# Altium PCB receiver.PcbDoc
Units mil, origin at the board's own origin, x right, y up, seen from the top; angles counter-clockwise.
Board outline 1968.5 x 3897.64 mil, 2 copper layers (Top Layer, Bottom Layer); 43 components, 17 nets, 113 pads, 22 vias.
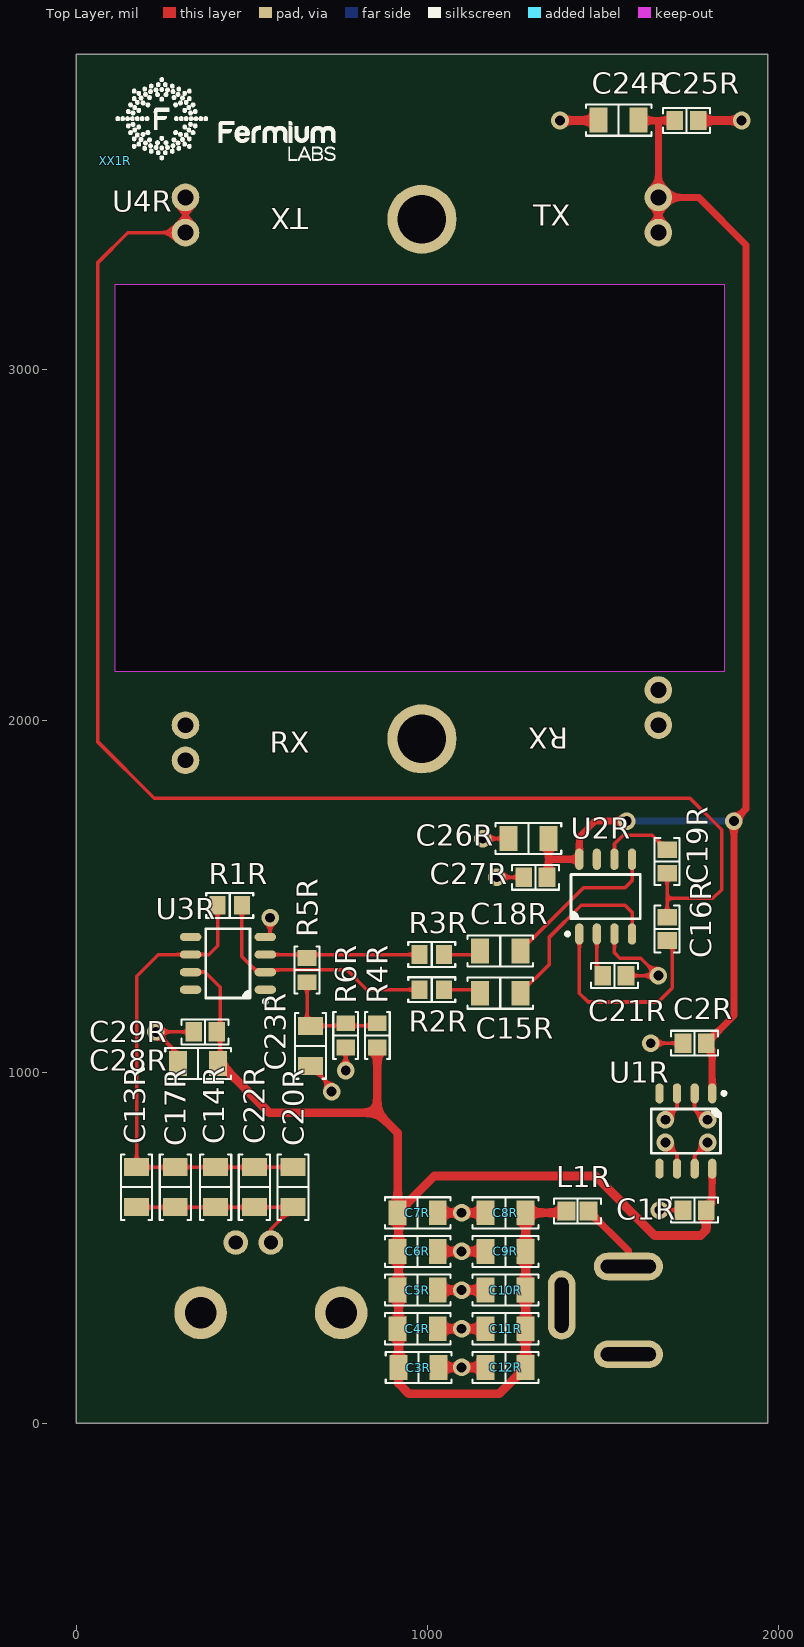
[diagram p0: Top Layer view]
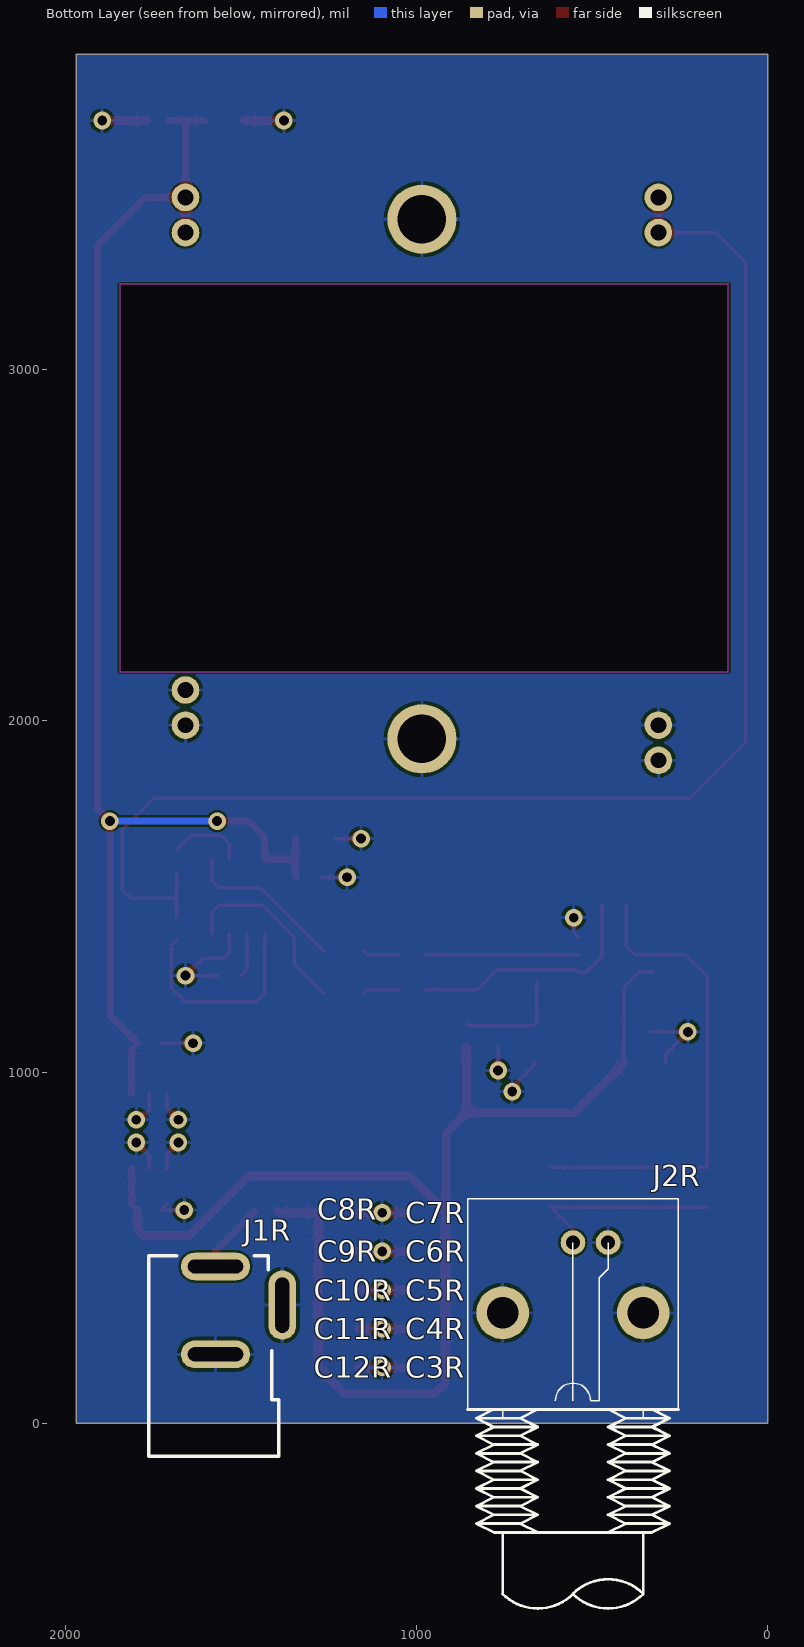
[diagram p1: Bottom Layer view, seen from below]

## Layer stack, top to bottom
Top Solder: solder mask 0.4, Solder Resist, Dk 3.5
Top Layer: signal copper 1.4
Dielectric 1: dielectric 12.6, FR-4, Dk 4.8
Bottom Layer: signal copper 1.4
Bottom Solder: solder mask 0.4, Solder Resist, Dk 3.5

## Board outline
0,0 1968.5,0 1968.5,3897.64 0,3897.64

## Design rules (kind name [scope] priority, off if disabled: settings)
Clearance [All] p1: gap=6 ignorepadtopadclearanceinfootprint=FALSE
FanoutControl Fanout_LCC [All] p1 off: bgadir=Out bgaviamode=Centered fanoutstyle=Auto fanoutdirection=Alternating viagrid=1 // Protel DXP Scope 1 Expression Was: IsLCC   Fanout_LCC (Default Rule)
FanoutControl Fanout_BGA [All] p2 off: bgadir=Out bgaviamode=Centered fanoutstyle=Auto fanoutdirection=Alternating viagrid=1 // Protel DXP Scope 1 Expression Was: IsBGA   Fanout_BGA (Default Rule)
FanoutControl Fanout_SOIC [All] p3 off: bgadir=Out bgaviamode=Centered fanoutstyle=Auto fanoutdirection=Alternating viagrid=1 // Protel DXP Scope 1 Expression Was: IsSOIC   Fanout_SOIC (Default Rule)
FanoutControl Fanout_Default [All] p4: bgadir=Out bgaviamode=Centered fanoutstyle=Auto fanoutdirection=Alternating viagrid=1 // Fanout_Default (Default Rule)
FanoutControl Fanout_Small [All] p5 off: bgadir=Out bgaviamode=Centered fanoutstyle=Auto fanoutdirection=Alternating viagrid=1 // Protel DXP Scope 1 Expression Was: (CompPinCount < 5)   Fanout_Small (Default Rule)
HoleSize [All] p1: absolutevalues=TRUE maxlimit=99999 minlimit=11.81 maxpercent=80.000 minpercent=20.000
MinimumSolderMaskSliver [All] p1 off: minsoldermaskwidth=7.87
PolygonConnect [All] p1: connectstyle=Relief reliefconductorwidth=10 reliefentries=4 polygonreliefangle="90 Angle" airgapwidth=10
RoutingVias [All] p1: holewidth=28 width=50 viastyle="Through Hole" minholewidth=28 minwidth=50 maxholewidth=28 maxwidth=50
SilkToSilkClearance [All] p1: silktosilkclearance=7.87
SilkToSolderMaskClearance [All] p1 off: minsilkscreentomaskgap=10 clearancetoexposedcopper=TRUE // Protel DXP Scope 1 Expression Was: IsPad
SolderMaskExpansion [All] p1: expansion=2
Width [All] p1: maxlimit=200 minlimit=6 preferedwidth=10
21 further rules are at their usual default settings.

## Components (designator, comment, footprint, x,y, rotation, side; value= is the part's Value field where it differs from the comment)
C1R "100nF 0805" "CAP 0805_2012" 1760.51,607.32 r180 top
C2R "100nF 0805" "CAP 0805_2012" 1760.51,1082.32 r180 top
C3R "10uF 25V 1206" "CAP 1206_3216" 974.88,159.09 r0 top
C4R "10uF 25V 1206" "CAP 1206_3216" 972.24,269.65 r0 top
C5R "10uF 25V 1206" "CAP 1206_3216" 972.24,379.65 r0 top
C6R "10uF 25V 1206" "CAP 1206_3216" 972.24,489.65 r0 top
C7R "10uF 25V 1206" "CAP 1206_3216" 972.24,599.65 r0 top
C8R "10uF 25V 1206" "CAP 1206_3216" 1222.24,599.65 r180 top
C9R "10uF 25V 1206" "CAP 1206_3216" 1222.24,489.65 r180 top
C10R "10uF 25V 1206" "CAP 1206_3216" 1222.24,379.65 r180 top
C11R "10uF 25V 1206" "CAP 1206_3216" 1222.24,269.65 r180 top
C12R "10uF 25V 1206" "CAP 1206_3216" 1222.24,159.65 r180 top
C13R "10uF 25V 1206" "CAP 1206_3216" 172.24,672.56 r270 top
C14R "10uF 25V 1206" "CAP 1206_3216" 397.24,672.56 r270 top
C15R "10uF 25V 1206" "CAP 1206_3216" 1207.24,1224.65 r180 top
C16R "1nF 0805" "CAP 0805_2012" 1682.24,1407.65 r270 top
C17R "10uF 25V 1206" "CAP 1206_3216" 282.24,672.56 r270 top
C18R "10uF 25V 1206" "CAP 1206_3216" 1207.24,1344.65 r180 top
C19R "1nF 0805" "CAP 0805_2012" 1682.24,1599.65 r90 top
C20R "10uF 25V 1206" "CAP 1206_3216" 617.24,672.56 r270 top
C21R "100nF 0805" "CAP 0805_2012" 1532.24,1274.65 r0 top
C22R "10uF 25V 1206" "CAP 1206_3216" 507.24,672.56 r270 top
C23R "10uF 25V 1206" "CAP 1206_3216" 667.24,1074.65 r270 top
C24R "10uF 25V 1206" "CAP 1206_3216" 1544.24,3709.65 r180 top
C25R "100nF 0805" "CAP 0805_2012" 1737.24,3708.65 r0 top
C26R "10uF 25V 1206" "CAP 1206_3216" 1287.24,1664.65 r180 top
C27R "100nF 0805" "CAP 0805_2012" 1307.24,1554.65 r180 top
C28R "10uF 25V 1206" "CAP 1206_3216" 347.24,1024.65 r180 top
C29R "100nF 0805" "CAP 0805_2012" 367.24,1114.65 r180 top
J1R "DC-10A FC68148" dc-jack 1571.8,446.85 r270 bottom
J2R "1-1337543-0" BNC-RA 754.33,314.96 r0 bottom
L1R "BLM21AG102SN1D" "FER 0805_2012" 1427.24,604.65 r180 top
R1R "220K 0805" "RES 0805_2012" 437.24,1474.65 r180 top
R2R "10K 0805" "RES 0805_2012" 1012.24,1234.65 r180 top
R3R "10K 0805" "RES 0805_2012" 1012.24,1334.65 r180 top
R4R "1K 0805" "RES 0805_2012" 857.24,1104.65 r270 top
R5R "220K 0805" "RES 0805_2012" 657.24,1290.2 r90 top
R6R "1K 0805" "RES 0805_2012" 767.24,1104.65 r90 top
U1R "L78L05ACD" "ST SOIC-8N" 1735.51,832.32 r270 top
U2R "SA612A" "TI SOIC-8 D" 1507.24,1499.65 r90 top
U3R "LF356M/NOPB" "TI SOIC-8 D" 432.24,1309.65 r180 top
U4R "HB100" HB100-buried 311.24,3489.65 r270 top
XX1R "FermiumLABS Logo" frm-med 111.81,3594.65 r0 top

## Footprints (in the part's own frame and the unit in brackets; to place one, negate y for a bottom-side part, rotate by r counter-clockwise, add the part's x,y. Pads: shape width x height; smd on the part's side, far side on the other; paste and mask are expansions set on the pad)
BNC-RA [mil]
  round 70 hole 40: 1(-200,-200) 2(-300,-200)
  round 150 hole 90: A(0,0) B(-400,0)
  silkscreen extent -500,-325 100,842, body extent -490,-280 91,1127, height 619
"CAP 0805_2012" [mm]
  rect 1.2x1.4 smd: 1(-0.838,0) 2(0.838,0)
  silkscreen extent -1.7,-0.9 1.7,0.9, body extent -1,-0.64 1,0.64, height 1.26
"CAP 1206_3216" [mm]
  rect 1.3x1.8 smd: 1(-1.45,0) 2(1.45,0)
  silkscreen extent -2.37,-1.12 2.37,1.12, body extent -1.6,-0.81 1.6,0.81, height 1.62
dc-jack [mm]
  oval 2x5 hole 1 slot 4 at 90 deg: 1(0,0) 3(6.35,0)
  oval 5x2 hole 1 slot 4 at 0 deg: 2(2.794,4.826)
  silkscreen extent -0.76,-4.83 13.72,4.57, body extent -0.76,-4.62 13.54,5.13, height 11.3
"FER 0805_2012" [mm]
  rect 1.3x1.4 smd: 1(-0.8,0) 2(0.8,0)
  silkscreen extent -1.7,-0.9 1.7,0.9, body extent -1,-0.64 1,0.64, height 1.26
frm-med [mil]
  silkscreen extent 1,1 626,237
HB100-buried [mm]
  round 2 hole 1.143: 1(0,34.188) 1(2.54,34.188) 2(0,0) 2(2.54,0) 3(38.151,0) 3(40.691,0) 4(35.611,34.188) 4(38.151,34.188)
  round 5 hole 3.5: 5(1.575,17.094) 5(39.141,17.094)
  Keep-Out Layer board cut-out: 34.286,38.934 34.286,-5.066 6.286,-5.066 6.286,38.934
  body extent -3.02,-3 43.48,37, height 3
"RES 0805_2012" [mm]
  rect 1.15x1.35 smd: 1(-0.875,0) 2(0.875,0)
  silkscreen extent -1.7,-0.9 1.7,0.9, body extent -0.95,-0.62 1.05,0.63, height 0.6
"ST SOIC-8N" [mm] "SOIC, 8-Leads, Body 4.90x3.90mm, Pitch 1.27mm, IPC Medium Density"
  oval 1.45x0.6 smd: 1(-2.725,1.905) 2(-2.725,0.635) 3(-2.725,-0.635) 4(-2.725,-1.905) 5(2.725,-1.905) 6(2.725,-0.635) 7(2.725,0.635) 8(2.725,1.905)
  silkscreen extent -2.85,-2.5 1.6,2.88, body extent -3.01,-2.45 3.01,2.45, height 1.5
"TI SOIC-8 D" [mm] "SOP, 8-Leads, Body 4.90x3.90mm, Pitch 1.27mm, IPC Medium Density"
  oval 1.55x0.6 smd: 1(-2.7,1.905) 2(-2.7,0.635) 3(-2.7,-0.635) 4(-2.7,-1.905) 5(2.7,-1.905) 6(2.7,-0.635) 7(2.7,0.635) 8(2.7,1.905)
  silkscreen extent -2.82,-2.5 1.6,2.88, body extent -3.01,-2.45 3.01,2.45, height 1.5

## Part data
C1R C2R C21R C25R C27R C29R: library part C100nF, "Capacitor", Manufacturer=YAGEO, Manufacturer Part Number=CC0805JRX7R9BB104, Part Number=C100nF
C3R C4R C5R C6R C7R C8R C9R C10R C11R C12R C13R C14R C15R C17R C18R C20R C22R C23R C24R C26R C28R: library part C10uF, "Capacitor", Manufacturer=SAMSUNG, Manufacturer Part Number=CL31A106KAHNNNE, Part Number=C10uF
C16R C19R: library part C1nF, "Capacitor", Manufacturer=Samsung, Manufacturer Part Number=CL21B102KCANNNC, Part Number=C1nF
J1R: library part jackdc, Manufacturer=CLIFF, Manufacturer Part Number="DC-10A FC68148", Part Number=jackdc
J2R: library part BNC-PCB-RA, "connector bnc", Manufacturer="TE CONNECTIVITY", Manufacturer Part Number=1-1337543-0, Part Number=BNC-PCB-RA
L1R: library part "Inductor Iron", "Magnetic-Core Inductor", Manufacturer=Murata, Manufacturer Part Number=BLM21AG102SN1D, Part Number="Inductor Iron"
R1R R5R: library part R220K, "Resistor", Manufacturer=Vishay, Manufacturer Part Number=CRCW0805220KFKEA, Part Number=R220K
R2R R3R: library part R10K, "Resistor", Manufacturer="Royal Electronic Factory", Manufacturer Part Number=0805S8J0103T5E, Part Number=R10K
R4R R6R: library part R1K, "Resistor", Manufacturer="Royal Electronic Factory", Manufacturer Part Number=0805S8J0102T5E, Part Number=R1K
U2R: Supplier Part Number 1=SA612AD, Supplier 1=TME, Supplier 2=Mouser, Supplier Part Number 2=771-SA612AD01112
U3R: library part LF358, Manufacturer="Texas Instruments", Manufacturer Part Number=LF356M/NOPB, Part Number=LF358
U4R: Manufacturer="China unspecified", Manufacturer Part Number=HB100, Part Number=HB100
XX1R: library part fermiumlabs-logo, Part Number=fermiumlabs-logo
U1R: Part Number=L78L05ACD

## Via types
v1: diameter 50, hole 28, Top Layer to Bottom Layer, 22 vias

## Nets (pads, with @x,y where several pads share a name; then routed paths per layer and width w, separated by ;. In a path a pad name is that pad's centre, name@x,y a point inside that pad or via, vN(x,y) a via of type N, cw(c..) or ccw(c..) an arc to the next point about the centre after c; other vN are vias at no path point)
5V: C2R.1 C24R.1 C25R.1 C26R.1 C27R.1 U1R.1 U2R.8 U4R.1 | length 3913.9
  Top Layer w10: C2R.1 C2R.1@1810.51,1065.32
  Top Layer w20: C27R.1 1344.33,1558.73 1344.33,1604.65 ; C26R.1 1344.33,1604.65 ; v1(1567.24,1714.65) 1477.24,1714.65 1432.24,1669.65 U2R.8 1345.63,1605.94 1344.33,1604.65 ; C24R.1@1601.25,3705.57 1604.33,3708.65 C25R.1 ; U4R.1@1657.24,3389.65 U4R.1@1657.24,3489.65 ; 1657.24,3701.65 U4R.1@1657.24,3489.65 ; C2R.1 1872.24,1161.06 v1(1872.24,1714.65) 1907.24,1749.65 1907.24,3354.65 1772.24,3489.65 U4R.1@1657.24,3489.65 ; U1R.1 C2R.1@1810.51,1065.32
  Bottom Layer w20: v1(1567.24,1714.65) v1(1872.24,1714.65)
12V: C1R.1 C3R.1 C4R.1 C5R.1 C6R.1 C7R.1 C8R.1 C9R.1 C10R.1 C11R.1 C12R.1 C28R.1 C29R.1 L1R.2 R4R.2 U1R.8 U3R.7 | length 3948.8
  Top Layer w10: U3R.7 367.24,1284.65 410.16,1241.73 C28R.1@410.16,1024.65 ; C1R.1 C1R.1@1810.51,624.32
  Top Layer w20: C1R.1@1810.51,624.32 U1R.8
  Top Layer w25: C28R.1@410.16,1024.65 550.16,884.65 857.24,884.65 ; R4R.2 857.24,884.65 ; L1R.2 1390.75,599.65 C8R.1 C9R.1 C10R.1 C11R.1 C12R.1 1204.33,84.65 947.24,84.65 917.8,114.09 C3R.1 917.8,379.65 917.8,597.01 C7R.1 ; C1R.1 1793.51,550.91 1777.24,534.65 1647.24,534.65 1477.24,704.65 1020.16,704.65 C7R.1 ; 857.24,884.65 915.16,826.73 C7R.1
GND: C1R.2 C2R.2 C3R.2 C4R.2 C5R.2 C6R.2 C7R.2 C8R.2 C9R.2 C10R.2 C11R.2 C12R.2 C21R.2 C23R.2 C24R.2 C25R.2 C26R.2 C27R.2 C28R.2 C29R.2 J1R.2 J1R.3 J2R.2 J2R.A J2R.B R6R.1 U1R.2 U1R.3 U1R.6 U1R.7 U2R.3 U3R.4 U4R.3 U4R.4 U4R.5 | length 2346.4
  Top Layer w10: C28R.2 290.16,1051.73 v1(227.24,1114.65) C29R.2 ; U3R.4 552.24,1398.35 v1(552.24,1439.65) ; C23R.2@660.16,1024.65 C23R.2 727.24,957.56 v1(727.24,944.65) ; v1(767.24,1004.65) R6R.1 ; v1(1157.24,1664.65) C26R.2 ; v1(1197.24,1554.65) C27R.2 ; U2R.3 1532.24,1339.65 1547.24,1324.65 1607.24,1324.65 v1(1657.24,1274.65) ; C21R.2 v1@1632.24,1274.65 ; v1(1635.51,1082.32) C2R.2 ; v1(1660.51,607.32) C1R.2 C1R.2@1710.51,624.32 ; v1(1677.24,799.65) 1710.51,766.38 U1R.6 ; v1(1677.24,864.65) 1710.51,897.91 U1R.3 ; U1R.7 1760.51,762.91 v1(1797.24,799.65) ; U1R.2 1760.51,891.38 1787.24,864.65 v1(1797.24,864.65)
  Top Layer w25: J2R.A J2R.A@754.65,314.65 ; C3R.2@1029.33,161.73 C3R.2 1032.52,159.65 v1(1097.24,159.65) C12R.2 ; C4R.2 v1(1097.24,269.65) C11R.2 ; C5R.2 v1(1097.24,379.65) C10R.2 ; C6R.2 v1(1097.24,489.65) C9R.2 ; C7R.2 v1(1097.24,599.65) C8R.2 ; v1(1377.24,3708.65) C24R.2@1490.16,3708.65 ; C25R.2@1767.24,3708.65 C25R.2 v1(1894.24,3708.65)
NetC13R_1: C13R.1 C14R.1 C17R.1 C20R.1 C22R.1 R1R.2 U3R.6 | length 1369.3
  Top Layer w10: R1R.2 402.8,1360.2 377.24,1334.65 U3R.6 234.24,1334.65 172.24,1272.65 C13R.1 C17R.1 C14R.1 C22R.1 C20R.1
NetC13R_2: C13R.2 C14R.2 C17R.2 C20R.2 C22R.2 J2R.1 | length 571.6
  Top Layer w10: C13R.2 C17R.2 C14R.2 C22R.2 C20R.2 554.33,552.56 J2R.1
NetC15R_1: C15R.1 U2R.4 | length 536.2
  Top Layer w10: C15R.1 1347.24,1307.56 1347.24,1384.65 1437.24,1474.65 1562.24,1474.65 1582.24,1454.65 U2R.4
NetC15R_2: C15R.2 R2R.1 | length 107.6
  Top Layer w10: R2R.1 1140.16,1234.65 C15R.2
NetC16R_1: C16R.1 C19R.1 U4R.2 | length 4089.1
  Top Layer w10: U4R.2@311.24,3489.65 311.24,3389.65 147.24,3389.65 62.24,3304.65 62.24,1939.65 222.24,1779.65 1747.24,1779.65 1837.24,1689.65 1837.24,1519.65 1812.24,1494.65 1682.24,1494.65 ; C16R.1 1682.24,1494.65 ; C19R.1 1682.24,1494.65
NetC16R_2: C16R.2 U2R.1 | length 601.8
  Top Layer w10: U2R.1 1432.24,1224.65 1457.24,1199.65 1657.24,1199.65 1697.24,1239.65 1697.24,1359.65 C16R.2
NetC18R_1: C18R.1 U2R.5 | length 462.1
  Top Layer w10: C18R.1 1444.33,1524.65 1562.24,1524.65 1582.24,1544.65 U2R.5
NetC18R_2: C18R.2 R3R.1 | length 107.6
  Top Layer w10: R3R.1 1140.16,1334.65 C18R.2
NetC19R_2: C19R.2 U2R.6 | length 221.5
  Top Layer w10: U2R.6 1532.24,1649.65 1557.24,1674.65 1640.24,1674.65 C19R.2
NetC21R_1: C21R.1 U2R.2 | length 125.7
  Top Layer w10: U2R.2 1482.24,1291.65 C21R.1
NetC23R_1: C23R.1 R4R.1 R5R.1 R6R.2 | length 321.2
  Top Layer w10: R5R.1 657.24,1141.73 C23R.1 849.88,1131.73 R4R.1
NetJ1R_1: J1R.1 L1R.1 | length 204.6
  Top Layer w20: L1R.1 1571.8,491.58 J1R.1
NetR1R_1: R1R.1 R2R.2 U3R.2 | length 695.9
  Top Layer w10: R1R.1 471.69,1329.29 516.33,1284.65 U3R.2 544.91,1291.01 770.88,1291.01 827.24,1234.65 R2R.2
NetR3R_2: R3R.2 R5R.2 U3R.3 | length 439.3
  Top Layer w10: U3R.3 R3R.2
pads on no net: U1R.4 U1R.5 U2R.7 U3R.1 U3R.5 U3R.8

## Polygon pours and split planes (outlines as drawn)
GND on Bottom Layer "Bottom Layer-No Net" (solid, pour order 0): 0,0 1968.5,0 1968.5,3897.64 0,3897.64

## Silkscreen, mask and mechanical layers (free items; w line width, h text height)
Mechanical 1:
  lines w10: 0,0 1968.5,0 1968.5,3897.64 0,3897.64 0,0 ; 114.4,2144.3 1846.69,2144.3 1846.69,3246.66 114.4,3246.66 114.4,2144.3

## Text inside footprints (layer, text, board x,y; h text height)
U4R: Top Overlay "RX" at 1401.24,1979.65 h60 r180; Top Overlay "TX" at 661.24,3459.65 h60 r180; Top Overlay "TX" at 1301.24,3409.65 h60; Top Overlay "RX" at 551.24,1909.65 h60; Mechanical 1 "## CUT CUT CUT ## / ## CUT CUT CUT ## / ## CUT CUT CUT ## / ## CUT CUT CUT ## / ## CUT CUT CUT ## / ## CUT CUT CUT ## / ## CUT CUT CUT ## / ## CUT CUT CUT ## / ## CUT CUT CUT ## / ## CUT CUT CUT ## / ## CUT CUT CUT ## / ## CUT CUT CUT ## / ## CUT CUT CUT ## / ## CUT CUT CUT ## / ## CUT CUT CUT ## / ## CUT CUT CUT ## / ## CUT CUT CUT ## / ## CUT CUT CUT ##" at 121.24,3199.65 h60 r270